# Altium PCB MARK1_EDU_PMOD.PcbDoc
Units mil, origin at the board's own origin, x right, y up, seen from the top; angles counter-clockwise.
Board outline 3593 x 2000 mil, 2 copper layers (Top Layer, Bottom Layer); 46 components, 54 nets, 285 pads, 555 vias.
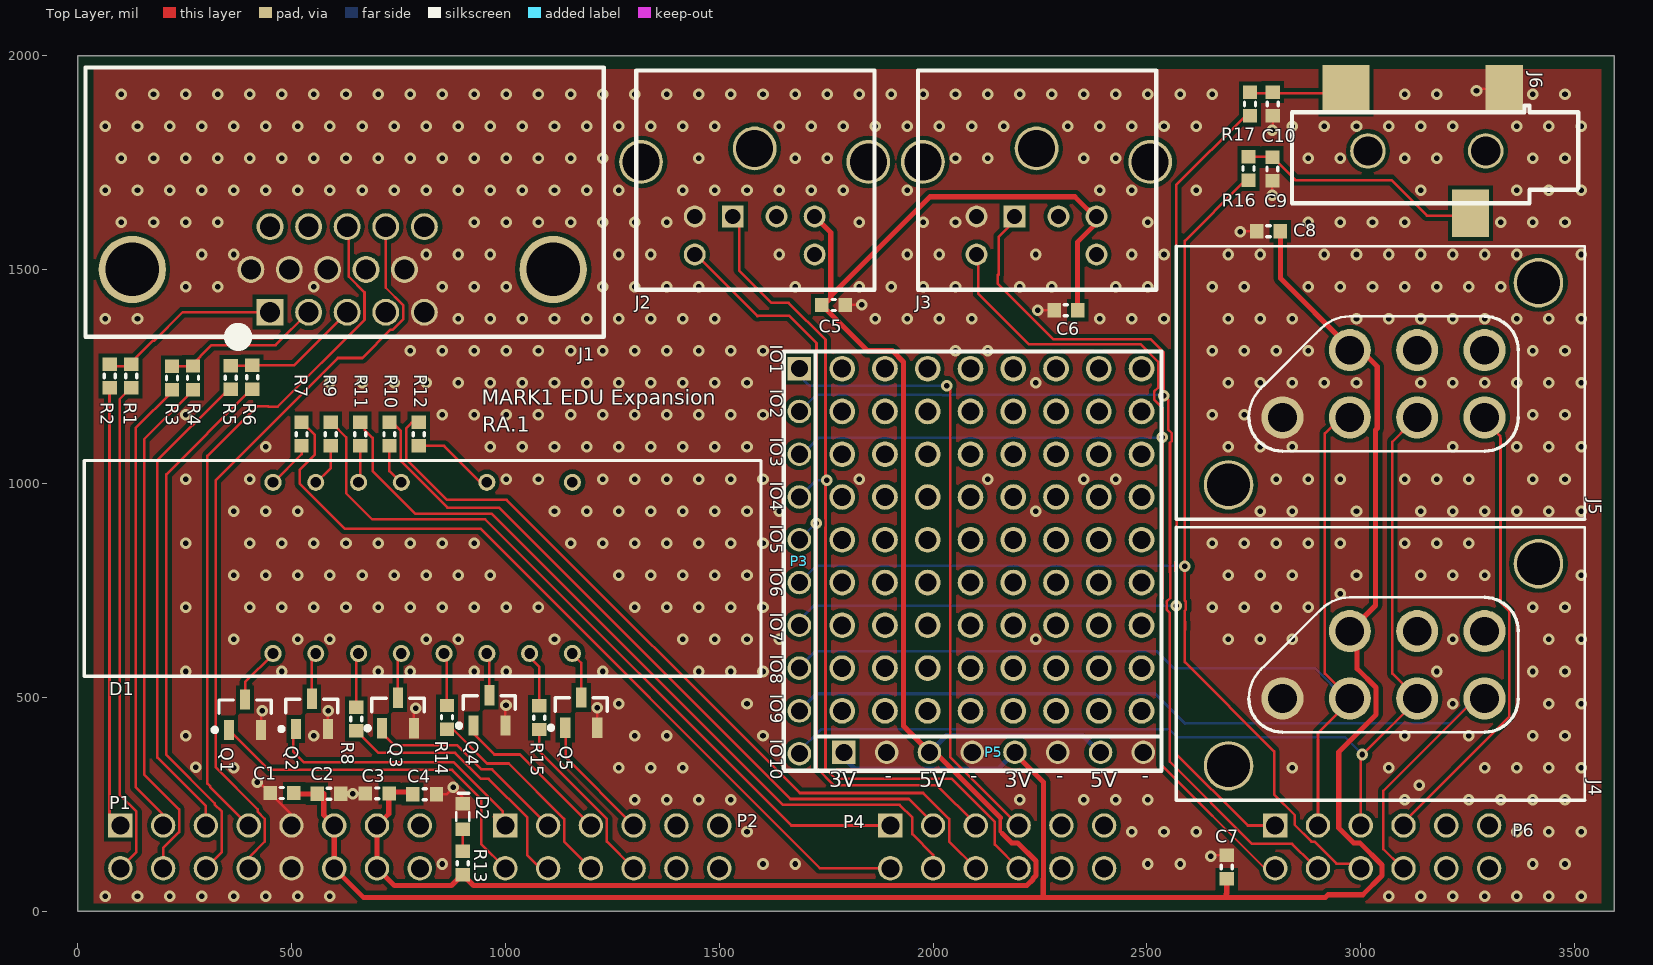
[diagram p0: Top Layer view]
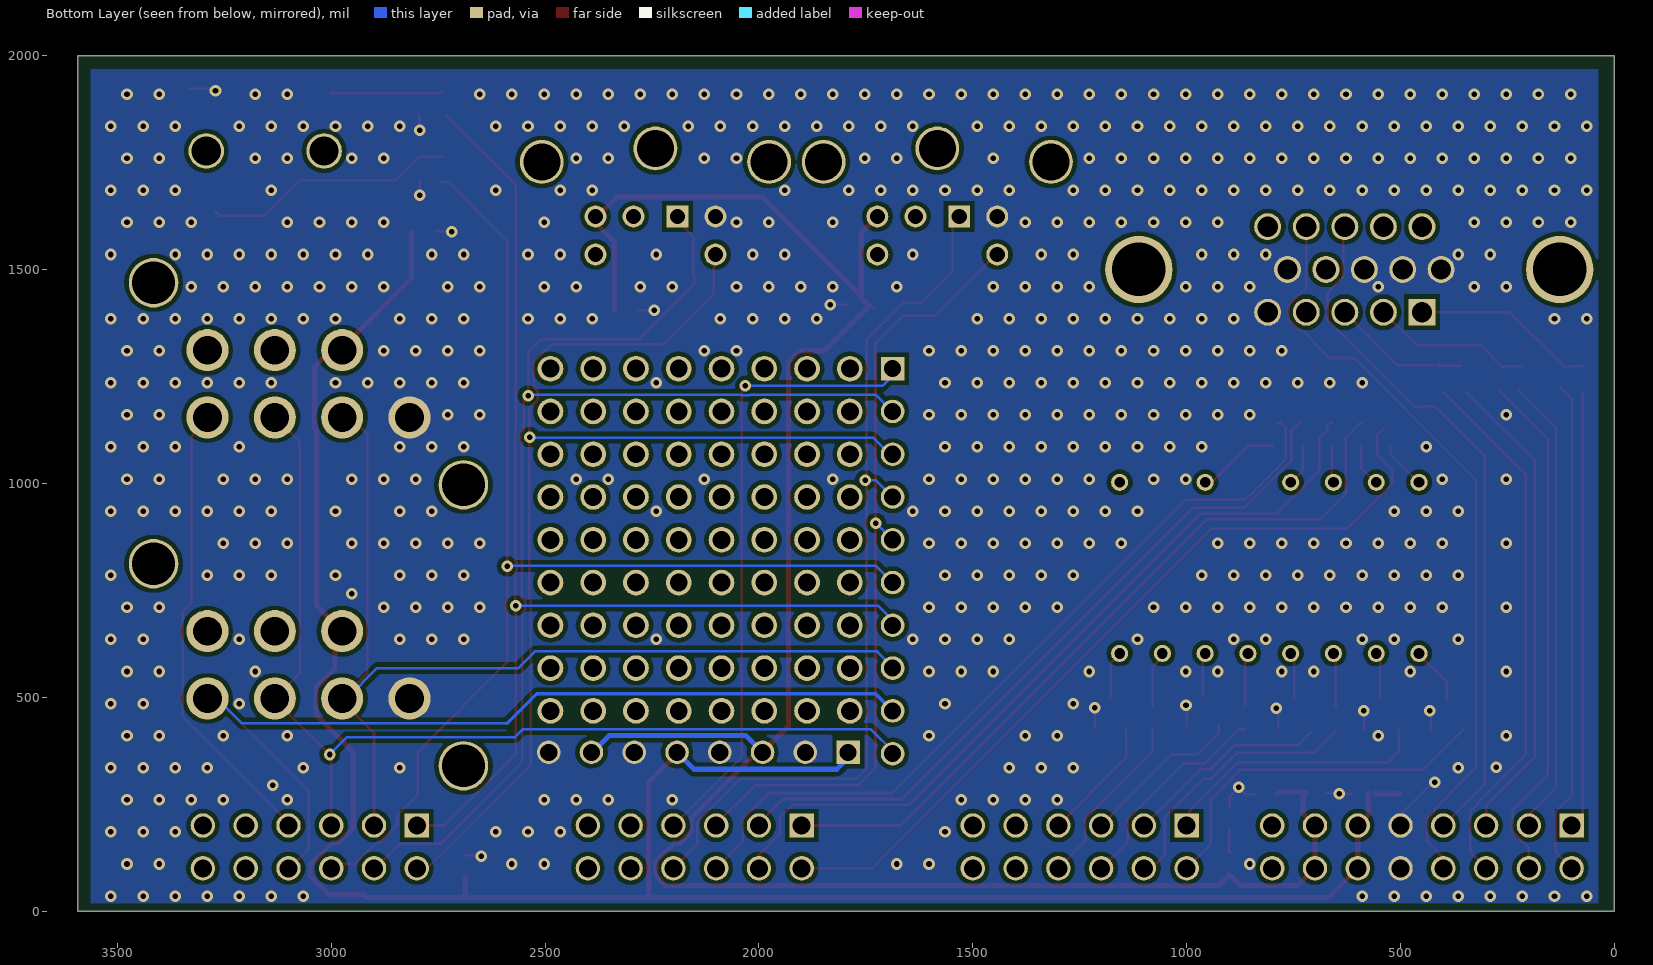
[diagram p1: Bottom Layer view, seen from below]
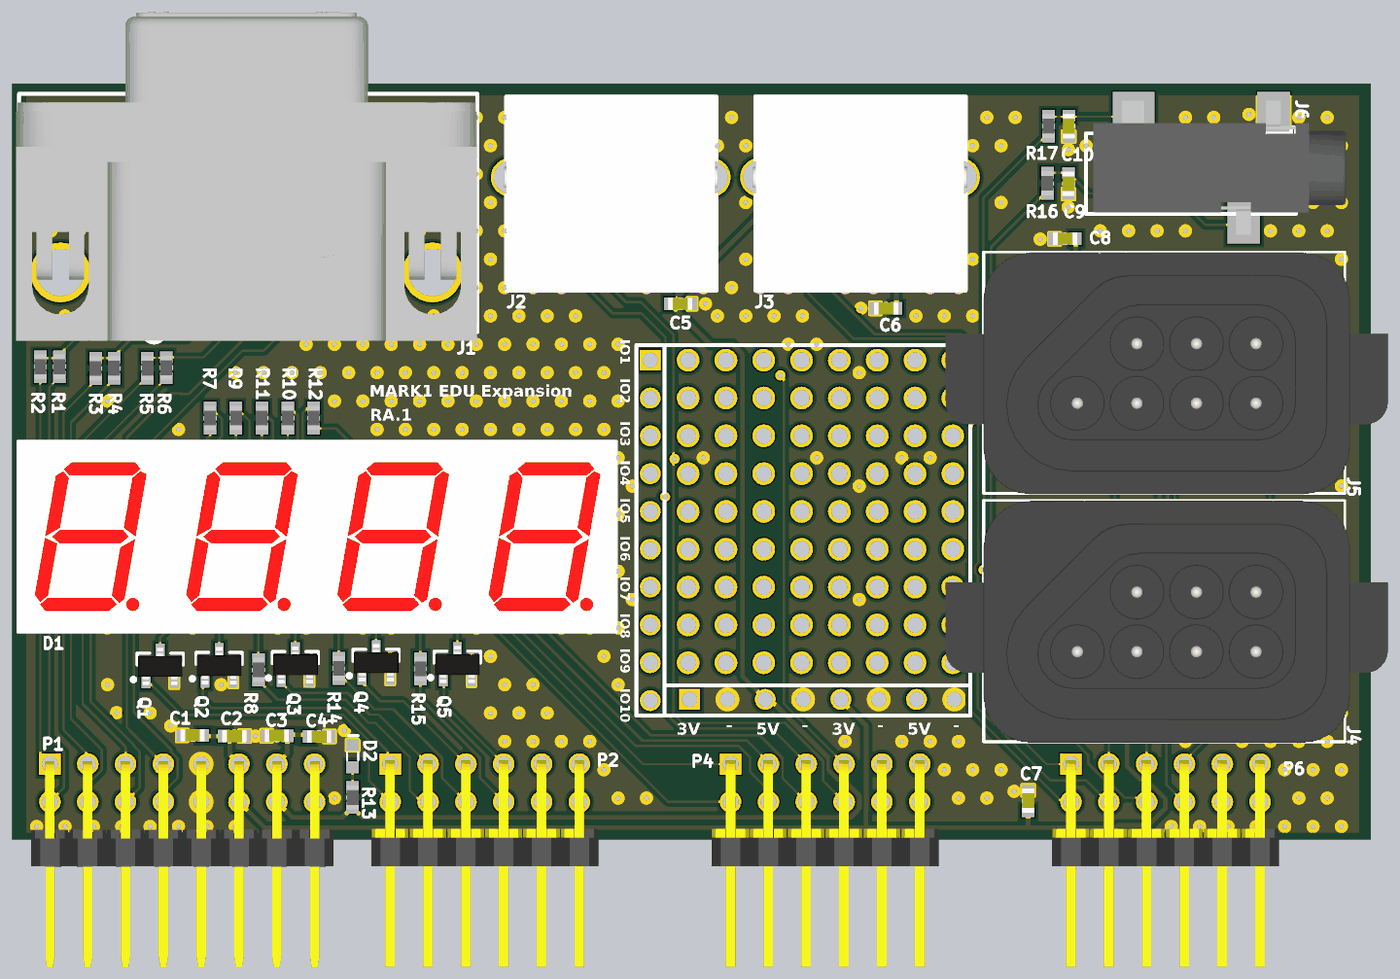
[diagram p2: 3D render of the assembled board from above, using the file's embedded part models]

## Layer stack, top to bottom
Top Layer: signal copper 1.4
Dielectric: dielectric 12.6, FR-4, Dk 4.8
Bottom Layer: signal copper 1.4

## Board outline
0,0 0,2000 3593,2000 3593,0

## Design rules (kind name [scope] priority, off if disabled: settings)
Clearance Poly [InPoly] p1: gap=10
Clearance [All] p2: gap=6
ComponentClearance LEDS+Mounts [(HasFootprint('LTM-450')) vs (HasFootprint('LED T1-3/4 GREEN - 0.45" STANDOFF') OR HasFootprint('LED T1-3/4 RED -  0.45" STANDOFF'))] p1: gap=0 collisioncheckmode=3 verticalgap=0 showdistances=FALSE
ComponentClearance ComponentClearance_1 [OnLayer('Mechanical 1')] p2: gap=0 collisioncheckmode=3 verticalgap=0 showdistances=FALSE
ComponentClearance [All] p3: gap=10 collisioncheckmode=3 verticalgap=10 showdistances=FALSE
Height [All] p1: minheight=0 maxheight=1500 prefheight=500
HoleSize [All] p1: absolutevalues=TRUE maxlimit=250 minlimit=1 maxpercent=80.000 minpercent=20.000
HoleToHoleClearance [All] p1: gap=2 allowstackedmicrovias=TRUE
MinimumSolderMaskSliver [All] p1: minsoldermaskwidth=0
PolygonConnect [All] p1: connectstyle=Direct reliefconductorwidth=10 reliefentries=4 polygonreliefangle="90 Angle" airgapwidth=10
RoutingVias [All] p1: holewidth=13 width=27 viastyle="Through Hole" minholewidth=13 minwidth=27 maxholewidth=13 maxwidth=27
SilkToSilkClearance [All] p1: silktosilkclearance=0
SilkscreenOverComponentPads [All] p1: minsilkscreentomaskgap=0
SolderMaskExpansion SolderMaskExpansion_1 [ISVIA] p1: expansion=-100
SolderMaskExpansion [All] p2: expansion=4
Width [All] p1: maxlimit=100 minlimit=6 preferedwidth=6
21 further rules are at their usual default settings.

## Classes and differential pairs
component class ANALOG_IO: C53

## Components (designator, comment, footprint, x,y, rotation, side; value= is the part's Value field where it differs from the comment)
C1 "4.7uF" C0603 477.56,276 r180 top (schematic designator C2)
C2 ".1uF" C0603 587.56,274 r0 top (schematic designator C1)
C3 ".1uF" C0603 700.56,275 r180 top (schematic designator C4)
C4 "4.7uF" C0603 811.56,273 r0 top (schematic designator C3)
C5 ".1uF" C0603 1767.56,1417 r180 top (schematic designator C10)
C6 ".1uF" C0603 2310.56,1405 r0 top (schematic designator C9)
C7 ".1uF" C0603 2686.56,103 r90 top (schematic designator C5)
C8 ".1uF" C0603 2784.56,1589 r180 top
C9 ".1uF" C0603 2793.56,1735 r270 top (schematic designator C6)
C10 ".1uF" C0603 2794,1887 r270 top (schematic designator C7)
D1 "7SEG" "LED - SSEG - LTC-4727JR" 456.8,602.33 r0 top (schematic designator D7)
D2 "LED 1.6X0.8MM 570NM GRN CLR SMD" "LED_0603 - GREEN" 900.56,221 r90 top (schematic designator D1)
J1 "VGA" 1-1734530-1 450,1400 r180 top (schematic designator J2)
J2 "PS/2" "MD-60S - PS/2" 1583,1535 r180 top (schematic designator J4)
J3 "PS/2" "MD-60S - PS/2" 2242,1535 r180 top
J4 "450-32360" "NES - 450-32360" 2817,497 r90 top (schematic designator J6)
J5 "450-32360" "NES - 450-32360" 2817,1154 r90 top (schematic designator J1)
J6 "SJ-3523-SMT" SJ-3523-SMT 3430,1777 r0 top (schematic designator J5)
P1 "MTSW-108-07-G-D-130-RA" "PMOD HEADER - MTSW-108-07-G-D-130-RA" 450,150 r180 top
P2 "MTSW-106-07-G-D-130-RA" "PMOD HEADER - Male" 1250,150 r180 top
P3 "Header10" "HEADER_10_40_100THRU SIP" 1687.56,1268 r270 top (schematic designator P5)
P4 "MTSW-106-07-G-D-130-RA" "PMOD HEADER - Male" 2150,150 r180 top (schematic designator P3)
P5 "Header8" "HEADER_8_40_100THRU SIP" 1791.56,371 r0 top (schematic designator P6)
P6 "MTSW-106-07-G-D-130-RA" "PMOD HEADER - Male" 3050,150 r180 top (schematic designator P4)
Q1 "ZXMN2F34FHTA" SOT-23 391.56,459 r90 top (schematic designator Q6)
Q2 "ZXMN2F34FHTA" SOT-23 547.56,461 r90 top (schematic designator Q5)
Q3 "ZXMN2F34FHTA" SOT-23 749,463 r90 top (schematic designator Q2)
Q4 "ZXMN2F34FHTA" SOT-23 962.56,469 r90 top
Q5 "ZXMN2F34FHTA" SOT-23 1177.56,464 r90 top (schematic designator Q3)
R1 "2k" R0603 125.14,1251 r90 top (schematic designator R2)
R2 "1k" R0603 75.14,1251 r90 top (schematic designator R3)
R3 "1k" R0603 220.71,1246 r90 top (schematic designator R8)
R4 "2k" R0603 269.75,1246.72 r90 top (schematic designator R7)
R5 "1k" R0603 358,1247 r90 top (schematic designator R10)
R6 "2k" R0603 408,1248 r90 top (schematic designator R9)
R7 "100" R0603 523.56,1115 r90 top (schematic designator R20)
R8 "100" R0603 651.56,449 r270 top (schematic designator R38)
R9 "100" R0603 592.06,1115 r90 top (schematic designator R41)
R10 "100" R0603 729.06,1115 r90 top (schematic designator R22)
R11 "100" R0603 660.56,1115 r90 top (schematic designator R19)
R12 "100" R0603 797.56,1115 r90 top (schematic designator R40)
R13 "330" R0603 900.56,112 r90 top (schematic designator R6)
R14 "100" R0603 863.56,453 r270 top (schematic designator R39)
R15 "100" R0603 1079.56,452 r270 top (schematic designator R42)
R16 "1k" R0603 2737.56,1736 r90 top (schematic designator R4)
R17 "1k" R0603 2741,1887 r90 top (schematic designator R5)

## Footprints (in the part's own frame and the unit in brackets; to place one, negate y for a bottom-side part, rotate by r counter-clockwise, add the part's x,y. Pads: shape width x height; smd on the part's side, far side on the other; paste and mask are expansions set on the pad)
1-1734530-1 [mm] "VGA DB15 HD connector female"
  rect 1.6x1.6 hole 1.2: 1(0,0)
  round 1.6 hole 1.2: 2(-2.29,0) 3(-4.58,0) 4(-6.87,0) 5(-9.16,0) 6(1.14,-2.54) 7(-1.14,-2.54) 8(-3.42,-2.54) 9(-5.7,-2.54) 10(-7.98,-2.54) 11(0,-5.08) 12(-2.29,-5.08) 13(-4.58,-5.08) 14(-6.87,-5.08) 15(-9.16,-5.08)
  round 4 hole 3.18: X(-16.81,-2.54) X(8.18,-2.54)
  silkscreen extent -19.82,-14.54 10.96,1.54, body extent -19.79,-20.01 11.16,2.04, height 12.25
C0603 [mm] "0603 Generic"
  rect 0.8x0.85 smd: 1(-0.7,0) 2(0.7,0)
  silkscreen extent -0.1,-0.33 0.1,0.33, body extent -0.8,-0.42 0.82,0.4, height 0.46
"HEADER_8_40_100THRU SIP" [mil]
  rect 55x55 hole 40: 1(0,0)
  round 55 hole 40: 2(100,0) 3(200,0) 4(300,0) 5(400,0) 6(500,0) 7(600,0) 8(700,0)
"HEADER_10_40_100THRU SIP" [mil] "HEADER 100 MIL PITCH"
  rect 55x55 hole 40: 1(0,0)
  round 55 hole 40: 2(100,0) 3(200,0) 4(300,0) 5(400,0) 6(500,0) 7(600,0) 8(700,0) 9(800,0) 10(900,0)
"LED - SSEG - LTC-4727JR" [mil] "LED - SSEG - LTC-4727JR"
  round 40 hole 25: 1(0,0) 2(100,0) 3(200,0) 4(300,0) 5(400,0) 6(500,0) 7(600,0) 8(700,0) 9(700,400) 11(500,400) 13(300,400) 14(200,400) 15(100,400) 16(0,400)
  silkscreen extent -441,-53 1141,451, body extent -441,-53 1141,451, height 276
"LED_0603 - GREEN" [mm] "LED_0603 - GREEN"
  rect 0.8x0.85 smd: A(-0.75,0) C(0.75,0)
  silkscreen extent -0.25,-0.38 1.37,0.38, body extent -0.8,-0.4 0.8,0.4, height 0.75
"MD-60S - PS/2" [mm]
  rect 1.3x1.3 hole 0.9: 1(1.3,-2.26)
  round 1.3 hole 0.9: 2(-1.3,-2.26) 3(3.56,-2.26) 4(-3.56,-2.26) 5(3.56,0) 6(-3.56,0)
  round 2.6 hole 2.2: x(-6.75,-5.5) x(0,-6.3) x(6.75,-5.5)
  silkscreen extent -7.11,-10.92 7.04,2.1, body extent -7.17,-11 7.17,2.1, height 13.3
"NES - 450-32360" [mm] "NES Controller Socket"
  round 2.5 hole 1.7: 1(0,0) 2(0,-4) 3(0,-8) 4(0,-12) 5(4,-12) 6(4,-8) 7(4,-4)
  round 2.94 hole 2.54 paste+0: 8(-4,3.2) 9(8,-15.2)
  silkscreen extent -6.04,-17.96 10.16,6.3, body extent -6.12,-20.85 10.13,8.86, height 17.61
"PMOD HEADER - Male" [mil] "68021-212HLF"
  rect 57x57 hole 42: 1(250,-50)
  round 57 hole 42: 2(150,-50) 3(50,-50) 4(-50,-50) 5(-150,-50) 6(-250,-50) 7(250,50) 8(150,50) 9(50,50) 10(-50,50) 11(-150,50) 12(-250,50)
  body extent -300,-60 300,486, height 225
"PMOD HEADER - MTSW-108-07-G-D-130-RA" [mil] "MTSW-108-07-G-D-130-RA"
  rect 57x57 hole 42: 1(350,-50)
  round 57 hole 42: 2(250,-50) 3(150,-50) 4(50,-50) 5(-50,-50) 6(-150,-50) 7(350,50) 8(250,50) 9(150,50) 10(50,50) 11(-50,50) 12(-150,50) 13(-250,-50) 14(-350,-50) 15(-250,50) 16(-350,50)
  body extent -400,-58 400,487, height 237
R0603 [mm] "0603 Generic"
  rect 0.8x0.85 smd: 1(-0.7,0) 2(0.7,0)
  silkscreen extent -0.1,-0.33 0.1,0.33, body extent -0.81,-0.41 0.81,0.41, height 0.46
SJ-3523-SMT [mm] "3.5MM Stereo Audio Jack"
  rect 2.2x2.8 smd: 1(-2.4,3.7) 3(-4.4,-3.7)
  rect 2.8x2.8 smd: 2(-11.8,3.7)
  round 2.108 hole 1.727 unplated: H1(-3.5,0) H2(-10.5,0)
  silkscreen extent -15,-3.1 2,2.7, body extent -14.52,-4.5 2.48,4.5, height 5.04
SOT-23 [mm] "SOT-23"
  rect 1.2x0.6 smd: 1(-0.9,0.95) 2(-0.9,-0.95) 3(0.9,0)
  silkscreen extent -1.02,-1.55 0.87,1.92, body extent -1.27,-1.5 1.23,1.5, height 1.07

## Part data
C1 C4: library part "C0603 - GRM188F51A475ZE20D", "4.7uF 10volts Y5V +80-20% (MLCC) - SMD/SMT 0603"
C2 C3 C5 C6 C7 C8 C9 C10: library part "C0603 - GRM188R71H104KA93D", "0.1uF 50volts X7R 10% MLCC SMD/SMT 0603"
D1: library part "LED - SSEG - LTC-4727JR", "LED Displays & Accessories 4 Digit, Red Low Current"
D2: library part APT1608CGCK
J1: library part "VGA - 1-1734530-1", "CONN HD D-SUB RCPT R/A 15POS"
J2 J3: library part "Con - D-60S", "CONN MINIDIN RECPT UNSHIELD 6POS - PS/2 mouse - keybaord"
J4 J5: "NES CONTROLLER SOCKET"
J6: "CONN AUDIO JACK 3.5MM STEREO SMD"
P1: library part "P-MOD - MTSW-108-07-G-D-130-RA", "Samtec Male Conn Unshrouded Header HDR 16 POS 2.54mm Solder RA Thru-Hole"
P2 P4 P6: library part "P-MOD - MTSW-106-07-G-D-130-RA", "Samtec Male Conn Unshrouded Header HDR 12 POS 2.54mm Solder RA Thru-Hole"
P3: "Header 10 pin"
P5: "Header 8 pin"
Q1 Q2 Q3 Q4 Q5: "MOSFET N-CHAN 20V SOT23-3"
R1 R4 R6: library part "R0603 - ERJ-3EKF2001V", "RES 2.00K OHM 1/10W 1% 0603 SMD"
R2 R3 R5: library part "R0603 - ERJ-3EKF1001V", "1Kohms 1% Thick Film Resistors - SMD 0603  Tol"
R7 R8 R9 R10 R11 R12 R14 R15: library part Res-Eli, "RES 10.0K OHM 1/10W 1% 0603 SMD"
R13: library part ERJ-3EKF3300V, "RES 330 OHM 1/10W 1% 0603 SMD"
R16 R17: library part ERJ-3EKF1001V, "RES 1.00K OHM 1/10W 1% 0603 SMD"

## Free pads (board coordinates)
  round 60 hole 42: X(1787.56,468) X(1787.56,568) X(1787.56,668) X(1787.56,768) X(1787.56,868) X(1787.56,968) X(1787.56,1068) X(1787.56,1168) X(1787.56,1268) X(1887.56,468) X(1887.56,568) X(1887.56,668) X(1887.56,768) X(1887.56,868) X(1887.56,968) X(1887.56,1068) X(1887.56,1168) X(1887.56,1268) X(1987.56,468) X(1987.56,568) X(1987.56,668) X(1987.56,768) X(1987.56,868) X(1987.56,968) X(1987.56,1068) X(1987.56,1168) X(1987.56,1268) X(2087.56,468) X(2087.56,568) X(2087.56,668) X(2087.56,768) X(2087.56,868) X(2087.56,968) X(2087.56,1068) X(2087.56,1168) X(2087.56,1268) X(2187.56,468) X(2187.56,568) X(2187.56,668) X(2187.56,768) X(2187.56,868) X(2187.56,968) X(2187.56,1068) X(2187.56,1168) X(2187.56,1268) X(2287.56,468) X(2287.56,568) X(2287.56,668) X(2287.56,768) X(2287.56,868) X(2287.56,968) X(2287.56,1068) X(2287.56,1168) X(2287.56,1268) X(2387.56,468) X(2387.56,568) X(2387.56,668) X(2387.56,768) X(2387.56,868) X(2387.56,968) X(2387.56,1068) X(2387.56,1168) X(2387.56,1268) X(2487.56,468) X(2487.56,568) X(2487.56,668) X(2487.56,768) X(2487.56,868) X(2487.56,968) X(2487.56,1068) X(2487.56,1168) X(2487.56,1268)

## Via types
v1: diameter 27, hole 13, Top Layer to Bottom Layer, 555 vias

## Nets (pads, with @x,y where several pads share a name; then routed paths per layer and width w, separated by ;. In a path a pad name is that pad's centre, name@x,y a point inside that pad or via, vN(x,y) a via of type N, cw(c..) or ccw(c..) an arc to the next point about the centre after c; other vN are vias at no path point)
3V3: C1.1 C2.1 C7.1 C8.1 J4.7 J5.7 P1.6 P1.12 P5.1 P5.5 | length 5308.1
  Top Layer w12: C1.1@501.56,275 502.56,274 C2.1@559.56,274 ; C2.1@559.56,276 C2.1@559.56,274 ; C2.1 C2.1@559.56,274 ; C2.1@575.56,275 575.56,224.44 P1.6 ; P1.6@596.56,195 600,191.56 P1.12 668,32 2917.56,32 2923.56,38 3004.56,38 3049.56,83 3049.56,107.72 2997.78,159.5 2983.22,159.5 2948.56,194.17 2948.56,372 3035.69,459.13 3035.69,522.35 2991.56,566.49 J4.7@2991.56,642 ; P5.5@2181.56,378 2258.5,301.06 2258.5,75.77 2257.56,74.83 2257.56,34 ; 2685.56,40 2686.56,41 C7.1 ; C8.1 2812.12,1479.44 J5.7@2971.56,1320 ; J4.7 3034.56,714.56 3034.56,1124.51 3038.69,1128.65 3038.69,1272.87 J5.7@2991.56,1320
  Bottom Layer w12: P5.1@1779.56,370 1818.06,331.5 2152.06,331.5 P5.5
5V: C3.1 C4.1 C5.2 C6.2 J2.4 J3.4 P1.13 P1.15 P5.3 P5.7 R13.1 | length 5046.6
  Top Layer w6: C5.2@1730.56,1412 C5.2@1732.78,1409.78
  Top Layer w8: 2157.56,218 2157.56,185.17 2162.14,180.58
  Top Layer w12: P1.13@694.78,194.78 700,189.56 P1.15 740.5,59.5 874.06,59.5 R13.1@896.56,82 ; P1.13 727.56,227.56 C3.1@727.56,273 ; C3.1@721.56,277 720.56,278 783.56,278 C4.1@788.56,273 ; R13.1 925.5,59.5 2219.06,59.5 2233.56,74 2233.56,76.28 2240.5,83.22 2240.5,116.78 2197.78,159.5 2183.22,159.5 2162.14,180.58 ; J2.4 1760.75,1586.39 1760.75,1437.75 ; C5.2 1847,1310 1904.96,1310 1931.06,1283.9 1931.06,432.5 P5.3@1990.56,373 ; C5.2@1745.56,1418 1760.75,1433.19 1760.75,1437.75 ; P5.3@1998.06,377.5 2157.56,218 ; C6.2 2338.12,1564.56 J3.4@2388.56,1615 ; J3.4@2386.56,1615 2331.56,1670 1993,1670 1760.75,1437.75
  Bottom Layer w12: P5.3 2031.06,410.5 2350.06,410.5 P5.7@2380.56,380
GND: C1.2 C2.2 C3.2 C4.2 C5.1 C6.1 C7.2 C8.2 C9.2 C10.2 D2.C J1.5 J1.6 J1.7 J1.8 J1.10 J2.3 J3.3 J4.1 J5.1 J6.1 P1.5 P1.11 P5.2 P5.4 P5.6 P5.8 Q1.2 Q2.2 Q3.2 Q4.2 Q5.2 | length 820.6
  Top Layer w6: v1(419.56,301) 425,301 C1.2 ; Q1.2 428.96,465.4 v1(431.56,468) ; C1.2@447.56,278 500,225.56 P1.5 ; Q2.2 584.96,467.4 v1(585.56,468) ; C2.2 v1(643.56,274) 646.56,277 C3.2@672.56,277 ; Q3.2 786.4,469.84 v1(790.56,474) ; C4.2 862.56,273 v1@878.06,288.5 ; D2.C@899.56,245 899.56,267 v1@878.06,288.5 ; Q4.2 999.96,479.4 v1(1001.56,481) ; v1(1214.56,475) 1214.96,474.6 Q5.2 ; C5.1 v1(1833.56,1417) ; v1(2244.56,1405) C6.1 ; v1(2649.56,128) 2652.12,130.56 C7.2 ; v1(2718.56,1588) 2719.56,1589 C8.2 ; v1(2792.56,1673) 2793.56,1674 C9.2 ; v1(2793.56,1825) 2794,1825.44 C10.2 ; v1(3270.56,1918) 3275.23,1922.67 J6.1 ; v1@878.06,288.5 v1(878.56,289) 877.56,289 v1@878.06,288.5
  other v1: 65,35 140,35 215,35 290,35 365,35 440,35 515,35 590,35 3065,35 3140,35 3215,35 3290,35 3365,35 3440,35 3515,35 852.5,110 1602.5,110 1677.5,110 2502.5,110 2577.5,110 3402.5,110 3477.5,110 1565,185 2465,185 2540,185 2615,185 3365,185 3440,185 3515,185 1302.5,260 1377.5,260 1452.5,260 1527.5,260 2202.5,260 2352.5,260 2427.5,260 2502.5,260 3102.5,260 3252.5,260 3327.5,260 3402.5,260 3477.5,260 3136.56,294 365,335 1265,335 1340,335 1415,335 2840,335 3065,335 3290,335 3365,335 3440,335 3515,335 276.56,336 252.5,410 552.5,410 1302.5,410 1377.5,410 1602.5,410 3102.5,410 3252.5,410 3402.5,410 3477.5,410 1265,485 1565,485 3215,485 3440,485 3515,485 252.5,560 477.5,560 702.5,560 777.5,560 927.5,560 1002.5,560 1227.5,560 1452.5,560 1527.5,560 1602.5,560 3177.5,560 3402.5,560 3477.5,560 365,635 515,635 590,635 815,635 890,635 1115,635 1415,635 1490,635 1565,635 1640,635 2240,635 2690,635 2765,635 2840,635 3215,635 3440,635 3515,635 252.5,710 402.5,710 477.5,710 552.5,710 627.5,710 702.5,710 777.5,710 852.5,710 927.5,710 1002.5,710 1077.5,710 1302.5,710 1377.5,710 1452.5,710 1527.5,710 1602.5,710 2652.5,710 2727.5,710 2802.5,710 2877.5,710 3402.5,710 3477.5,710 2952.56,742 365,785 440,785 515,785 590,785 665,785 740,785 815,785 890,785 965,785 1265,785 1340,785 1415,785 1490,785 1565,785 2690,785 2765,785 2840,785 2990,785 3140,785 3215,785 3290,785 3515,785 252.5,860 402.5,860 477.5,860 552.5,860 627.5,860 702.5,860 777.5,860 852.5,860 927.5,860 1152.5,860 1227.5,860 1302.5,860 1377.5,860 1452.5,860 1527.5,860 1602.5,860 2652.5,860 2727.5,860 2802.5,860 2877.5,860 2952.5,860 3102.5,860 3177.5,860 3252.5,860 365,935 440,935 515,935 1115,935 1190,935 1265,935 1340,935 1415,935 1490,935 1565,935 1640,935 2240,935 2765,935 2840,935 2990,935 3140,935 3215,935 3290,935 3365,935 3440,935 3515,935 252.5,1010 402.5,1010 1002.5,1010 1077.5,1010 1227.5,1010 1302.5,1010 1377.5,1010 1452.5,1010 1527.5,1010 1602.5,1010 1827.5,1010 2127.5,1010 2352.5,1010 2427.5,1010 2802.5,1010 2877.5,1010 2952.5,1010 3102.5,1010 3177.5,1010 3252.5,1010 3402.5,1010 3477.5,1010 440,1085 965,1085 1040,1085 1115,1085 1190,1085 1265,1085 1340,1085 1415,1085 1490,1085 1565,1085 2690,1085 2765,1085 2840,1085 3215,1085 3365,1085 3440,1085 3515,1085 252.5,1160 852.5,1160 927.5,1160 1002.5,1160 1077.5,1160 1152.5,1160 1227.5,1160 1302.5,1160 1377.5,1160 1452.5,1160 1527.5,1160 1602.5,1160 2652.5,1160 2727.5,1160 3402.5,1160 3477.5,1160 590,1235 665,1235 740,1235 815,1235 890,1235 965,1235 1040,1235 1115,1235 1190,1235 1265,1235 1340,1235 1415,1235 1490,1235 1565,1235 2240,1235 2690,1235 2765,1235 2840,1235 2915,1235 2990,1235 3140,1235 3215,1235 3290,1235 3365,1235 3440,1235 3515,1235 777.5,1310 852.5,1310 927.5,1310 1002.5,1310 1077.5,1310 1152.5,1310 1227.5,1310 1302.5,1310 1377.5,1310 1452.5,1310 1527.5,1310 1602.5,1310 2052.5,1310 2127.5,1310 2652.5,1310 2727.5,1310 2802.5,1310 2877.5,1310 3402.5,1310 3477.5,1310 65,1385 140,1385 890,1385 965,1385 1040,1385 1115,1385 1190,1385 1265,1385 1340,1385 1415,1385 1490,1385 1865,1385 1940,1385 2015,1385 2090,1385 2390,1385 2465,1385 2540,1385 2690,1385 2765,1385 2840,1385 2990,1385 3065,1385 3140,1385 3215,1385 3290,1385 3365,1385 3440,1385 3515,1385 252.5,1460 327.5,1460 552.5,1460 852.5,1460 927.5,1460 1002.5,1460 1227.5,1460 1302.5,1460 1377.5,1460 1452.5,1460 1677.5,1460 1827.5,1460 1902.5,1460 1977.5,1460 2052.5,1460 2202.5,1460 2277.5,1460 2427.5,1460 2502.5,1460 2652.5,1460 2727.5,1460 2877.5,1460 2952.5,1460 3027.5,1460 3102.5,1460 3177.5,1460 3252.5,1460 3327.5,1460 290,1535 365,1535 815,1535 890,1535 965,1535 1265,1535 1340,1535 1640,1535 1940,1535 2015,1535 2240,1535 2465,1535 2540,1535 2690,1535 2765,1535 2915,1535 2990,1535 3065,1535 3140,1535 3215,1535 3290,1535 3365,1535 3515,1535 102.5,1610 177.5,1610 252.5,1610 327.5,1610 927.5,1610 1002.5,1610 1077.5,1610 1152.5,1610 1227.5,1610 1302.5,1610 1377.5,1610 1827.5,1610 1977.5,1610 2052.5,1610 2502.5,1610 2877.5,1610 2952.5,1610 3027.5,1610 3102.5,1610 3327.5,1610 3402.5,1610 3477.5,1610 65,1685 140,1685 215,1685 290,1685 365,1685 440,1685 515,1685 590,1685 665,1685 740,1685 815,1685 890,1685 965,1685 1040,1685 1115,1685 1190,1685 1265,1685 1415,1685 1490,1685 1565,1685 1640,1685 1715,1685 1790,1685 1940,1685 2390,1685 2465,1685 2615,1685 3140,1685 3365,1685 3440,1685 3515,1685 102.5,1760 177.5,1760 252.5,1760 327.5,1760 402.5,1760 477.5,1760 552.5,1760 627.5,1760 702.5,1760 777.5,1760 852.5,1760 927.5,1760 1002.5,1760 1077.5,1760 1152.5,1760 1227.5,1760 1452.5,1760 1677.5,1760 1752.5,1760 2052.5,1760 2127.5,1760 2352.5,1760 2427.5,1760 2877.5,1760 2952.5,1760 3102.5,1760 3177.5,1760 3402.5,1760 3477.5,1760 65,1835 140,1835 215,1835 290,1835 365,1835 440,1835 515,1835 590,1835 665,1835 740,1835 815,1835 890,1835 965,1835 1040,1835 1115,1835 1190,1835 1265,1835 1340,1835 1415,1835 1490,1835 1640,1835 1715,1835 1790,1835 1865,1835 1940,1835 2015,1835 2090,1835 2165,1835 2315,1835 2390,1835 2465,1835 2540,1835 2615,1835 2840,1835 2915,1835 2990,1835 3065,1835 3140,1835 3215,1835 3365,1835 3440,1835 3515,1835 102.5,1910 177.5,1910 252.5,1910 327.5,1910 402.5,1910 477.5,1910 552.5,1910 627.5,1910 702.5,1910 777.5,1910 852.5,1910 927.5,1910 1002.5,1910 1077.5,1910 1152.5,1910 1227.5,1910 1302.5,1910 1377.5,1910 1452.5,1910 1527.5,1910 1602.5,1910 1677.5,1910 1752.5,1910 1827.5,1910 1902.5,1910 1977.5,1910 2052.5,1910 2127.5,1910 2202.5,1910 2277.5,1910 2352.5,1910 2427.5,1910 2502.5,1910 2577.5,1910 2652.5,1910 3102.5,1910 3177.5,1910 3402.5,1910 3477.5,1910
IO1: P3.1 P4.4 | length 1475.8
  Top Layer w6: v1(2031.56,1228) 2040.56,1219 2040.56,359.44 P4.4
  Bottom Layer w6: P3.1@1670.56,1269 1711.56,1228 v1(2031.56,1228)
NES1_DAT: J5.4 P6.4 | length 1062.9
  Top Layer w6: P6.4 3100,207.44 3347.65,455.09 3347.65,700.69 3326.66,721.68 3326.66,1105.9 3325.66,1104.9 3325.66,1110.9 J5.4@3298.56,1138
NES2_DAT/IO9: J4.4 P3.9 P6.10 | length 2147.8
  Top Layer w6: P6.10@3093.56,104 3052.56,145 3052.56,281 3258.56,487 J4.4@3275.56,487
  Bottom Layer w6: 2588.56,438.79 3208.35,438.79 J4.4@3264.56,495
  Bottom Layer w8: P3.9 1727.56,508 2519.35,508 2588.56,438.79
NES_CLK/IO8: J4.2 J5.2 P3.8 P6.2 | length 2360.7
  Top Layer w6: P6.2 2900,416.44 J4.2@2975.56,492 ; J5.2@2950.56,1148 2947.56,1148 2916.27,1116.71 2916.27,555.21 J4.2
  Bottom Layer w6: P3.8@1681.56,565 1723.56,607 2523.56,607 2562.56,568 2892.56,568 J4.2@2964.56,496
NES_LAT/IO10: J4.3 J5.3 P3.10 P6.3 | length 2390.3
  Top Layer w6: P6.3 v1@3000,361.44 ; v1@3004.06,365.5 J4.3@3114.56,476 ; J5.3@3110.56,1134 3073.75,1097.19 3073.75,555.21 J4.3 ; J4.3@3115.56,475 J4.3@3134.76,494.2
  Bottom Layer w6: P3.10@1682.56,369 1739.06,425.5 2551.45,425.5 2570.56,406.39 2963.17,406.39 v1(3003.56,366)
NetC9_1: C9.1 J6.3 R16.2 | length 591.9
  Top Layer w6: R16.2 2791,1763.56 C9.1@2791.56,1763 ; C9.1 2847.12,1709 3071.56,1709 3154.56,1626 3260.56,1626 J6.3@3270.56,1636
NetC10_1: C10.1 J6.2 R17.2 | length 261.6
  Top Layer w6: R17.2 2743.56,1912 J6.2@3001.56,1912
NetD1_1: D1.1 Q1.3 | length 133.9
  Top Layer w6: Q1.3 391.56,535 D1.1@457.56,601
NetD1_2: D1.2 Q2.3 | length 107.5
  Top Layer w6: Q2.3 547.56,593 554.56,600 D1.2@554.56,601
NetD1_3: D1.3 R8.1 | length 130.3
  Top Layer w6: R8.1 651.56,604 D1.3@653.56,606
NetD1_4: D1.4 Q3.3 | length 104.7
  Top Layer w6: Q3.3 749,592.44 D1.4@756.56,600
NetD1_5: D1.5 R14.1 | length 127.8
  Top Layer w6: D1.5@855.56,605 863.56,597 R14.1
NetD1_6: D1.6 Q4.3 | length 92.1
  Top Layer w6: D1.6@956.56,594 962.56,588 Q4.3
NetD1_7: D1.7 R15.1 | length 124
  Top Layer w6: D1.7@1056.56,594 1079.56,571 R15.1
NetD1_8: D1.8 Q5.3 | length 106
  Top Layer w6: D1.8@1159.56,598 1177.56,580 Q5.3
NetD1_11: D1.11 R12.1 | length 199.3
  Top Layer w6: R12.1 857.12,1087.44 942.23,1002.33 D1.11 ; D1.11@956.8,1005 D1.11@961.56,1005
NetD1_13: D1.13 R10.1 | length 106.3
  Top Layer w6: R10.1 729.06,1028.5 D1.13@762.56,995
NetD1_14: D1.14 R11.1 | length 85.1
  Top Layer w6: D1.14@656.56,1004 660.56,1008 R11.1
NetD1_15: D1.15 R9.1 | length 103.6
  Top Layer w6: D1.15@555.56,999 592.06,1035.5 R9.1
NetD1_16: D1.16 R7.1 | length 112.8
  Top Layer w6: D1.16@457.56,1002 523.56,1068 R7.1
NetD2_A: D2.A R13.2 | length 56.7
  Top Layer w6: R13.2@897.56,136 900.56,139 R13.2 D2.A
NetJ1_1: J1.1 R1.2 R2.2 | length 429.8
  Top Layer w6: R2.2@73.56,1274 118.56,1274 122.56,1278 122.56,1280 175.56,1333 178.56,1333 245.56,1400 J1.1
NetJ1_2: J1.2 R3.2 R4.2 | length 379.3
  Top Layer w6: R3.2@215.56,1274 258.56,1274 261.56,1271 313.56,1323 463.16,1323 J1.2
NetJ1_3: J1.3 R5.2 R6.2 | length 326.9
  Top Layer w6: R5.2 403.12,1274.56 R6.2@410.56,1282 ; R6.2 506.12,1275.56 J1.3@628.56,1398
PS2_1_CLK/IO3: J3.5 P3.3 P6.7 | length 2767.2
  Top Layer w6: J3.5@2105.56,1534 2105.56,1444 2224.56,1325 2485.71,1325 2526.56,1284.15 2526.56,1223.82 2517.06,1214.32 2517.06,1195.68 2537.56,1175.18 2537.56,731.79 2534.06,728.29 2534.06,341.5 2775.56,100 P6.7
  Bottom Layer w6: P3.3@1687.56,1061 1733.56,1107 2534.56,1107 v1(2535.56,1108)
PS2_1_DAT/IO2: J3.1 P3.2 P6.8 | length 2907.1
  Top Layer w6: 2151.56,1488 2151.56,1466.18 2280.74,1337 2508.56,1337 2539.56,1306 v1(2539.56,1205) 2549.56,1195 2549.56,1125.82 2558.06,1117.32 2558.06,1098.68 2554.06,1094.68 2554.06,791.71 2554.56,791.21 2554.56,731.82 2546.06,723.32 2546.06,704.68 2553.56,697.18 2553.56,349 2745.56,157 2839.56,157 2884.56,112 P6.8@2895.56,112 ; 2153.56,1488 2153.56,1576 J3.1@2195.56,1618
  Bottom Layer w6: P3.2 1726.56,1207 2020.74,1207 2022.24,1205.5 2040.88,1205.5 2042.38,1207 2537.56,1207 v1(2539.56,1205)
PS2_2_CLK/IO5: J2.5 P3.5 P4.3 | length 1856
  Top Layer w6: J2.5@1446.56,1534 1589.56,1391 ; 1590.56,1392 1663.56,1392 1727.56,1328 1727.56,335.03 1768.59,294 2009.56,294 2100,203.56 P4.3 ; P4.3@2099.28,199.28 P4.3@2107.56,191
  Bottom Layer w6: P3.5 v1(1726.56,907)
PS2_2_DAT/IO4: J2.1 P3.4 P4.10 | length 2072.7
  Top Layer w6: J2.1@1529.56,1632 1546.56,1615 1546.56,1498 1622.57,1421.99 1662.57,1421.99 1748.56,1336 1748.56,916.82 1749.06,916.32 1749.06,897.68 1748.56,897.18 1748.56,333 1772.56,309 2044.03,309 2144.56,208.47 2144.56,155.44 P4.10
  Bottom Layer w6: P3.4 1726.56,1007 v1(1751.56,1007)
PWM1/IO6: P3.6 P6.9 R16.1 | length 2793.3
  Top Layer w6: R16.1@2742.56,1704 2725.56,1704 2588.56,1567 v1(2588.56,806) 2588.56,725.82 2591.06,723.32 2591.06,704.68 2588.56,702.18 2588.56,676.82 2589.06,676.32 2589.06,657.68 2588.56,657.18 2588.56,582 2797.56,373 2797.56,272.17 2845.64,224.08 2845.64,201.32 2884.47,162.5 2891.56,162.5 2943.06,111 P6.9@2998.56,111
  Bottom Layer w6: P3.6 1726.56,807 2587.56,807 v1(2588.56,806)
PWM2/IO7: P3.7 P6.1 R17.1 | length 2770.4
  Top Layer w6: R17.1@2731.56,1860 2568.56,1697 2568.56,1123.79 2570.06,1122.29 2570.06,819.32 2566.06,815.32 2566.06,796.68 2570.06,792.68 2570.06,715.5 v1(2568.56,714) 2568.56,367.4 2735.96,200 P6.1
  Bottom Layer w6: P3.7@1680.56,673 1721.56,714 v1(2568.56,714)
SEG_A: P4.8 R11.2 | length 1864.5
  Top Layer w6: R11.2@659.56,1143 662.56,1143 671.56,1134 671.56,1124 689.56,1106 689.56,1028.56 789.12,929 967.89,929 1648.89,248 1921.73,248 1951.56,218.17 1951.56,180 2000,131.56 P4.8
SEG_B: P4.7 R7.2 | length 1902.8
  Top Layer w6: R7.2@539.56,1128 554.56,1113 554.56,1067 519.56,1032 519.56,998.56 624.12,894 941.56,894 1735.56,100 P4.7
SEG_C: P4.2 R10.2 | length 1700.3
  Top Layer w6: R10.2@734.56,1143 755.56,1122 755.56,1052.03 864.59,943 985.56,943 1666.56,262 1943.56,262 2000,205.56 P4.2
SEG_CTRL_A1: P2.7 Q1.1 | length 841.7
  Top Layer w6: Q1.1 447.72,330 875.56,330 943.56,262 943.56,156.44 P2.7
SEG_CTRL_A2: P2.1 Q2.1 | length 668.4
  Top Layer w6: Q2.1@504.56,424 504.56,372 528.56,348 879,348 993.56,233.44 993.56,206.44 P2.1 ; P2.1@973.56,220 P2.1@997.56,196
SEG_CTRL_A3: P2.3 Q4.1 | length 385.1
  Top Layer w6: Q4.1 925.16,415.4 974.56,366 1034,366 P2.3 ; P2.3@1200.56,207 P2.3@1202.56,205
SEG_CTRL_A4: P2.4 Q5.1 | length 292.5
  Top Layer w6: Q5.1@1143.56,426 1141.56,424 1141.56,358.44 P2.4
SEG_CTRL_L: P2.2 Q3.1 | length 479.3
  Top Layer w6: Q3.1@710.56,417 739.56,388 887.56,388 944.56,331 969,331 P2.2
SEG_D: P2.8 R8.2 | length 644.6
  Top Layer w6: R8.2 703,370 882.31,370 943.31,309 960.73,309 1051.56,218.17 1051.56,130 1095.56,86 P2.8@1095.56,93 ; P2.8@1097.56,93 P2.8@1097.56,96
SEG_DP: P2.10 R15.2 | length 415.8
  Top Layer w6: R15.2 1079.56,373.47 1237.5,215.53 1237.5,162.5 P2.10
SEG_E: P2.9 R14.2 | length 505.9
  Top Layer w6: R14.2 877.12,425.44 957.56,345 1008.03,345 1137.5,215.53 1137.5,162.5 P2.9@1199,101 ; P2.9 P2.9@1199,101 ; P2.9@1202.56,101 P2.9@1199,101
SEG_F: P4.9 R12.2 | length 1857
  Top Layer w6: R12.2@788.56,1141 780.56,1141 768.56,1129 768.56,1056 863.23,961.33 1003.23,961.33 1688.56,276 1977.03,276 2037.5,215.53 2037.5,162.5 P4.9 P4.9@2100.56,100
SEG_G: P4.1 R9.2 | length 1775.5
  Top Layer w6: R9.2@590.56,1140 595.56,1140 627.8,1107.75 627.8,976.75 688.56,916 952.56,916 1668.56,200 P4.1
VGA_B0: P1.9 R6.1 | length 1261.9
  Top Layer w6: P1.9 337.5,137.5 337.5,232.47 320.56,249.42 320.56,252 207.56,365 207.56,1021 R6.1@399.56,1213
VGA_B1: P1.3 R5.1 | length 1127.3
  Top Layer w6: P1.3 300,245.56 186.56,359 186.56,1054 R5.1@346.56,1214
VGA_G0: P1.8 R4.1 | length 1212.3
  Top Layer w6: P1.8 200,146.97 237.5,184.47 237.5,237.5 155.56,319.44 155.56,1103 R4.1@268.56,1216
VGA_G1: P1.2 R3.1 | length 1078.7
  Top Layer w6: P1.2 200,225.5 135.56,289.94 135.56,1129 R3.1@222.56,1216
VGA_HS: J1.13 P1.4 | length 1644.9
  Top Layer w6: 309.78,290.22 P1.4 ; 310.56,291 303.56,298 303.56,1064 419.56,1180 445.56,1180 ; 445.56,1179 467.56,1179 670.81,1382.25 670.81,1446.33 633.91,1483.23 633.91,1595.65 J1.13@624.56,1605
VGA_R0: P1.7 R1.1 | length 1179
  Top Layer w6: P1.7@90.56,91 137.5,137.94 137.5,232.23 98.56,271.17 98.56,1196.86 R1.1
VGA_R1: P1.1 R2.1 | length 1021.5
  Top Layer w6: R2.1@74.56,1211 74.56,225.44 P1.1
VGA_VS: J1.14 P1.10 | length 1806.7
  Top Layer w6: P1.10@400.56,91 400.56,125.56 437.5,162.5 437.5,215.53 420.79,232.25 420.79,238 322.56,336.23 322.56,1007 608.56,1293 665.56,1293 732.06,1359.5 737.25,1359.5 760.97,1383.23 760.97,1416.77 720.47,1457.27 J1.14
pads on no net: D1.9 J1.4 J1.9 J1.11 J1.12 J1.15 J1.X J2.2 J2.6 J2.x J3.2 J3.6 J3.x J4.5 J4.6 J4.8 J4.9 J5.5 J5.6 J5.8 J5.9 J6.H1 J6.H2 P1.14 P1.16 P2.5 P2.6 P2.11 P2.12 P4.5 P4.6 P4.11 P4.12 P6.5 P6.6 P6.11 P6.12

## Polygon pours and split planes (outlines as drawn)
GND on Top Layer "GND_TOP" (solid, remove dead copper, pour order 3): 37.56,1968 37.56,18 3562.56,18 3562.56,1943 3562.56,1968 37.56,1968
GND on Bottom Layer "GND_BOT" (solid, remove dead copper, pour order 4): 37.56,1968 37.56,18 3562.56,18 3562.56,1943 3562.56,1968 37.56,1968

## Silkscreen, mask and mechanical layers (free items; w line width, h text height)
Top Overlay:
  lines w10: 1725.06,408 2534.06,408 2534.06,328 ; 1727.37,1308 1725.06,1305.69 1725.06,328 ; 1725.06,328 2534.06,328 ; 1725.06,328 1650.81,328 1650.81,1308 2534.06,1308 2534.06,328
  text "IO1" at 1608.39,1323.51 h50 r270
  text "IO2" at 1608.39,1220.39 h50 r270
  text "MARK1 EDU Expansion" at 944.56,1171.96 h60
  text "RA.1" at 946.56,1108.35 h60
  text "IO3" at 1608.39,1106.82 h50 r270
  text "IO4" at 1608.39,1003.33 h50 r270
  text "IO5" at 1608.39,903.49 h50 r270
  text "IO6" at 1608.39,803.19 h50 r270
  text "IO7" at 1608.39,696.9 h50 r270
  text "IO8" at 1608.49,599.19 h50 r270
  text "IO9" at 1608.39,506.82 h50 r270
  text "IO10" at 1608.39,401.4 h50 r270
  text "-" at 1887.56,288 h60
  text "-" at 2087.56,288 h60
  text "-" at 2287.56,288 h60
  text "-" at 2487.56,288 h60
  text "3V" at 1757.56,278 h60
  text "5V" at 1967.56,278 h60
  text "3V" at 2167.56,278 h60
  text "5V" at 2367.56,278 h60
Generic Top Title Block:
  lines w0: 7414.83,-2289.5 5021.83,-2289.5 5021.83,-1699.69 7414.83,-1699.69
  lines w8: 5719.78,-2289.5 5719.78,-1699.69 ; 5719.78,-2092.9 7414.83,-2092.9 ; 5719.78,-1896.29 7414.83,-1896.29 ; 6268.18,-2092.9 6268.18,-1896.29 ; 7414.83,-2289.5 5021.83,-2289.5 5021.83,-1699.69 7414.83,-1699.69
  lines w10: -2485,-1390 -2385,-1390 ; -2485,-390 -2385,-390 -2385,610 -2485,610 ; -2485,1610 -2385,1610 ; -2485,2610 -2385,2610 ; -2485,3610 -2385,3610 ; -2485,4610 -2385,4610 ; -1485,-2390 -1485,-2290 ; -1485,5010 -1485,5110 ; -485,-2390 -485,-2290 ; -485,5010 -485,5110 ; 515,-2390 515,-2290 ; 515,5010 515,5110 ; 1515,-2390 1515,-2290 ; 1515,5010 1515,5110 ; 2515,-2390 2515,-2290 ; 2515,5010 2515,5110 ; 3515,-2390 3515,-2290 ; 3515,5010 3515,5110 ; 4515,-2390 4515,-2290 ; 4515,5010 4515,5110 ; 5515,-2390 5515,-2290 ; 5515,5010 5515,5110 ; 6515,-2390 6515,-2290 ; 6515,5010 6515,5110 ; 7414.83,-2289.5 7414.83,-1699.69 ; 7415,-1390 7515,-1390 ; 7415,-390 7515,-390 7515,610 7415,610 ; 7415,1610 7515,1610 ; 7415,2610 7515,2610 ; 7415,3610 7515,3610 ; 7415,4610 7515,4610 ; 7515,-2290 7515,-2390 ; 7515,-2390 -2485,-2390 -2485,5110 7515,5110 7515,-2390 ; -2385,-2290 7415,-2290 7415,5010 -2385,5010 -2385,-2290
  text "1" at -2020,5030 h100
  text "2" at -945,5030 h100
  text "3" at 5,5030 h100
  text "4" at 1055,5030 h100
  text "5" at 2005,5030 h100
  text "6" at 3030,5030 h100
  text "7" at 3980,5030 h100
  text "8" at 4955,5030 h100
  text "9" at 6055,5030 h100
  text "10" at 7005,5030 h100
  text "H" at -2470,4775 h100
  text "H" at 7435,4770 h100
  text "G" at -2470,4050 h100
  text "G" at 7435,4045 h100
  text "F" at -2460,3065 h100
  text "F" at 7445,3060 h100
  text "E" at -2470,2100 h100
  text "E" at 7435,2095 h100
  text "D" at -2470,1100 h100
  text "D" at 7435,1095 h100
  text "C" at -2460,130 h100
  text "C" at 7445,125 h100
  text "B" at -2465,-915 h100
  text "B" at 7440,-920 h100
  text ".PCB_TITLE" at 5769,-1837 h175
  text "" at 5520.37,-1851.77 h152.56
  text "" at 5602.48,-1851.77 h152.56
  text "A" at -2460,-1915 h100
  text "A" at 7445,-1920 h100
  text "R" at 5769.64,-2045.4 h95.35
  text "e" at 5824.38,-2045.4 h95.35
  text "v" at 5879.13,-2045.4 h95.35
  text ":" at 5933.87,-2045.4 h95.35
  text "2" at 5071.68,-2052.46 h343.27
  text ".PCB_VERSION" at 5997,-2053 h175
  text ".ENGINEER" at 6325,-2054 h175
  text "" at 5271.1,-2064.56 h343.27
  text "" at 5421.65,-2064.56 h343.27
  text "W" at 5071.68,-2143.7 h95.35
  text "a" at 5153.8,-2143.7 h95.35
  text "v" at 5208.54,-2143.7 h95.35
  text "e" at 5263.29,-2143.7 h95.35
  text "n" at 5318.03,-2143.7 h95.35
  text "u" at 5372.78,-2143.7 h95.35
  text "m" at 5427.52,-2143.7 h95.35
  text "b" at 5509.64,-2143.7 h95.35
  text "e" at 5564.38,-2143.7 h95.35
  text "r" at 5619.13,-2143.7 h95.35
  text ".GERBER_GEN_DATE" at 5754,-2238 h175
  text "T" at 5071.68,-2242 h95.35
  text "e" at 5126.42,-2242 h95.35
  text "c" at 5181.17,-2242 h95.35
  text "h" at 5222.23,-2242 h95.35
  text "n" at 5276.97,-2242 h95.35
  text "o" at 5331.72,-2242 h95.35
  text "l" at 5386.46,-2242 h95.35
  text "o" at 5413.84,-2242 h95.35
  text "g" at 5468.58,-2242 h95.35
  text "i" at 5523.33,-2242 h95.35
  text "e" at 5550.7,-2242 h95.35
  text "s" at 5605.44,-2242 h95.35
  text "1" at -2010,-2365 h100
  text "2" at -935,-2365 h100
  text "3" at 15,-2365 h100
  text "4" at 1065,-2365 h100
  text "5" at 2015,-2365 h100
  text "6" at 3040,-2365 h100
  text "7" at 3990,-2365 h100
  text "8" at 4965,-2365 h100
  text "9" at 6065,-2365 h100
  text "10" at 7015,-2365 h100
PCB Notes Title Block:
  lines w0: 7414.83,-2289.5 5021.83,-2289.5 5021.83,-1699.69 7414.83,-1699.69
  lines w8: 5719.78,-2289.5 5719.78,-1699.69 ; 5719.78,-2092.9 7414.83,-2092.9 ; 5719.78,-1896.29 7414.83,-1896.29 ; 6268.18,-2092.9 6268.18,-1896.29 ; 7414.83,-2289.5 5021.83,-2289.5 5021.83,-1699.69 7414.83,-1699.69
  lines w10: -2485,-1390 -2385,-1390 ; -2485,-390 -2385,-390 -2385,610 -2485,610 ; -2485,1610 -2385,1610 ; -2485,2610 -2385,2610 ; -2485,3610 -2385,3610 ; -2485,4610 -2385,4610 ; -1485,-2390 -1485,-2290 ; -1485,5010 -1485,5110 ; -485,-2390 -485,-2290 ; -485,5010 -485,5110 ; 515,-2390 515,-2290 ; 515,5010 515,5110 ; 1515,-2390 1515,-2290 ; 1515,5010 1515,5110 ; 2515,-2390 2515,-2290 ; 2515,5010 2515,5110 ; 3515,-2390 3515,-2290 ; 3515,5010 3515,5110 ; 4515,-2390 4515,-2290 ; 4515,5010 4515,5110 ; 5515,-2390 5515,-2290 ; 5515,5010 5515,5110 ; 6515,-2390 6515,-2290 ; 6515,5010 6515,5110 ; 7414.83,-2289.5 7414.83,-1699.69 ; 7415,-1390 7515,-1390 ; 7415,-390 7515,-390 7515,610 7415,610 ; 7415,1610 7515,1610 ; 7415,2610 7515,2610 ; 7415,3610 7515,3610 ; 7415,4610 7515,4610 ; 7515,-2290 7515,-2390 ; 7515,-2390 -2485,-2390 -2485,5110 7515,5110 7515,-2390 ; -2385,-2290 7415,-2290 7415,5010 -2385,5010 -2385,-2290
  text "1" at -2020,5030 h100
  text "2" at -945,5030 h100
  text "3" at 5,5030 h100
  text "4" at 1055,5030 h100
  text "5" at 2005,5030 h100
  text "6" at 3030,5030 h100
  text "7" at 3980,5030 h100
  text "8" at 4955,5030 h100
  text "9" at 6055,5030 h100
  text "10" at 7005,5030 h100
  text "H" at -2470,4775 h100
  text "H" at 7435,4770 h100
  text "G" at -2470,4050 h100
  text "G" at 7435,4045 h100
  text "F" at -2460,3065 h100
  text "F" at 7445,3060 h100
  text "E" at -2470,2100 h100
  text "E" at 7435,2095 h100
  text "D" at -2470,1100 h100
  text "D" at 7435,1095 h100
  text "C" at -2460,130 h100
  text "C" at 7445,125 h100
  text "B" at -2465,-915 h100
  text "B" at 7440,-920 h100
  text ".PCB_TITLE" at 5769,-1837 h175
  text "" at 5520.37,-1851.77 h152.56
  text "" at 5602.48,-1851.77 h152.56
  text "A" at -2460,-1915 h100
  text "A" at 7445,-1920 h100
  text "R" at 5769.64,-2045.4 h95.35
  text "e" at 5824.38,-2045.4 h95.35
  text "v" at 5879.13,-2045.4 h95.35
  text ":" at 5933.87,-2045.4 h95.35
  text "2" at 5071.68,-2052.46 h343.27
  text ".PCB_VERSION" at 5997,-2053 h175
  text ".ENGINEER" at 6325,-2054 h175
  text "" at 5271.1,-2064.56 h343.27
  text "" at 5421.65,-2064.56 h343.27
  text "W" at 5071.68,-2143.7 h95.35
  text "a" at 5153.8,-2143.7 h95.35
  text "v" at 5208.54,-2143.7 h95.35
  text "e" at 5263.29,-2143.7 h95.35
  text "n" at 5318.03,-2143.7 h95.35
  text "u" at 5372.78,-2143.7 h95.35
  text "m" at 5427.52,-2143.7 h95.35
  text "b" at 5509.64,-2143.7 h95.35
  text "e" at 5564.38,-2143.7 h95.35
  text "r" at 5619.13,-2143.7 h95.35
  text ".GERBER_GEN_DATE" at 5754,-2238 h175
  text "T" at 5071.68,-2242 h95.35
  text "e" at 5126.42,-2242 h95.35
  text "c" at 5181.17,-2242 h95.35
  text "h" at 5222.23,-2242 h95.35
  text "n" at 5276.97,-2242 h95.35
  text "o" at 5331.72,-2242 h95.35
  text "l" at 5386.46,-2242 h95.35
  text "o" at 5413.84,-2242 h95.35
  text "g" at 5468.58,-2242 h95.35
  text "i" at 5523.33,-2242 h95.35
  text "e" at 5550.7,-2242 h95.35
  text "s" at 5605.44,-2242 h95.35
  text "1" at -2010,-2365 h100
  text "2" at -935,-2365 h100
  text "3" at 15,-2365 h100
  text "4" at 1065,-2365 h100
  text "5" at 2015,-2365 h100
  text "6" at 3040,-2365 h100
  text "7" at 3990,-2365 h100
  text "8" at 4965,-2365 h100
  text "9" at 6065,-2365 h100
  text "10" at 7015,-2365 h100
PCB Notes:
  lines w50: -2200,990 2000,990 ; -2150,4190 6800,4190 ; 2050,-160 2050,840
  text "PCB Fabrication Notes" at -2146,4335 h750
  text "Unless otherwise specified, all dimensions are in inches" at -2150,3940 h200
  text "Overall Dimension:   Z.Z\" x  Y.Y\"" at -2150,3740 h200
  text "Finished Thickness:  .062\"" at -2150,3540 h200
  text "Layer Count:" at -2150,3340 h200
  text "Drill Count:" at -2150,3140 h200
  text ".Hole_Count" at -1050,3140 h200
  text "PAD Count:" at -2150,2940 h200
  text ".PAD_Count" at -1050,2940 h200
  text "Solder Mask:  Green LPI SMOBC" at -2150,2740 h200
  text "Silkscreen:  White Non-Conductive Ink LPI Process" at -2150,2540 h200
  text "RS274-X Gerber Format, 2.5 Leading Zeros Suppressed" at -2150,2340 h200
  text "Excellon Drill Format, 2.5 Trailing Zeros Suppressed" at -2150,2140 h200
  text "Layer Details" at -2200,1140 h350
  text "POLARITY" at 700,1090 h350
  text ".GTL" at -2150,640 h200
  text "Top Copper" at -1200,640 h200
  text "POSITIVE" at 800,640 h200
  text ".GBL" at -2150,440 h200
  text "Bottom Copper" at -1200,440 h200
  text "POSITIVE" at 800,440 h200
  text "N-Layer Stackup" at 2200,340 h200
  text ".GTO" at -2150,-910 h200
  text "Top Silkscreen" at -1150,-910 h200
  text ".GBO" at -2150,-1110 h200
  text "Bottom Silkscreen" at -1150,-1110 h200
  text ".GTS" at -2150,-1460 h200
  text "Top Soldermask" at -1150,-1460 h200
  text ".GBS" at -2150,-1660 h200
  text "Bottom Soldermask" at -1150,-1660 h200
  text ".TXT" at -2150,-1860 h200
  text "NC-DRILL" at -1150,-1860 h200
Fabrication Reference  Title Block:
  lines w0: 7414.83,-2289.5 5021.83,-2289.5 5021.83,-1699.69 7414.83,-1699.69
  lines w8: 5719.78,-2289.5 5719.78,-1699.69 ; 5719.78,-2092.9 7414.83,-2092.9 ; 5719.78,-1896.29 7414.83,-1896.29 ; 6268.18,-2092.9 6268.18,-1896.29 ; 7414.83,-2289.5 5021.83,-2289.5 5021.83,-1699.69 7414.83,-1699.69
  lines w10: -2485,-1390 -2385,-1390 ; -2485,-390 -2385,-390 -2385,610 -2485,610 ; -2485,1610 -2385,1610 ; -2485,2610 -2385,2610 ; -2485,3610 -2385,3610 ; -2485,4610 -2385,4610 ; -1485,-2390 -1485,-2290 ; -1485,5010 -1485,5110 ; -485,-2390 -485,-2290 ; -485,5010 -485,5110 ; 515,-2390 515,-2290 ; 515,5010 515,5110 ; 1515,-2390 1515,-2290 ; 1515,5010 1515,5110 ; 2515,-2390 2515,-2290 ; 2515,5010 2515,5110 ; 3515,-2390 3515,-2290 ; 3515,5010 3515,5110 ; 4515,-2390 4515,-2290 ; 4515,5010 4515,5110 ; 5515,-2390 5515,-2290 ; 5515,5010 5515,5110 ; 6515,-2390 6515,-2290 ; 6515,5010 6515,5110 ; 7414.83,-2289.5 7414.83,-1699.69 ; 7415,-1390 7515,-1390 ; 7415,-390 7515,-390 7515,610 7415,610 ; 7415,1610 7515,1610 ; 7415,2610 7515,2610 ; 7415,3610 7515,3610 ; 7415,4610 7515,4610 ; 7515,-2290 7515,-2390 ; 7515,-2390 -2485,-2390 -2485,5110 7515,5110 7515,-2390 ; -2385,-2290 7415,-2290 7415,5010 -2385,5010 -2385,-2290
  text "1" at -2020,5030 h100
  text "2" at -945,5030 h100
  text "3" at 5,5030 h100
  text "4" at 1055,5030 h100
  text "5" at 2005,5030 h100
  text "6" at 3030,5030 h100
  text "7" at 3980,5030 h100
  text "8" at 4955,5030 h100
  text "9" at 6055,5030 h100
  text "10" at 7005,5030 h100
  text "H" at -2470,4775 h100
  text "H" at 7435,4770 h100
  text "Fabrication Reference Drawing" at -800,4590 h500
  text "G" at -2470,4050 h100
  text "G" at 7435,4045 h100
  text "F" at -2460,3065 h100
  text "F" at 7445,3060 h100
  text "E" at -2470,2100 h100
  text "E" at 7435,2095 h100
  text "D" at -2470,1100 h100
  text "D" at 7435,1095 h100
  text "C" at -2460,130 h100
  text "C" at 7445,125 h100
  text "B" at -2465,-915 h100
  text "B" at 7440,-920 h100
  text ".PCB_TITLE" at 5769,-1837 h175
  text "" at 5520.37,-1851.77 h152.56
  text "" at 5602.48,-1851.77 h152.56
  text "A" at -2460,-1915 h100
  text "A" at 7445,-1920 h100
  text "R" at 5769.64,-2045.4 h95.35
  text "e" at 5824.38,-2045.4 h95.35
  text "v" at 5879.13,-2045.4 h95.35
  text ":" at 5933.87,-2045.4 h95.35
  text "2" at 5071.68,-2052.46 h343.27
  text ".PCB_VERSION" at 5997,-2053 h175
  text ".ENGINEER" at 6325,-2054 h175
  text "" at 5271.1,-2064.56 h343.27
  text "" at 5421.65,-2064.56 h343.27
  text "W" at 5071.68,-2143.7 h95.35
  text "a" at 5153.8,-2143.7 h95.35
  text "v" at 5208.54,-2143.7 h95.35
  text "e" at 5263.29,-2143.7 h95.35
  text "n" at 5318.03,-2143.7 h95.35
  text "u" at 5372.78,-2143.7 h95.35
  text "m" at 5427.52,-2143.7 h95.35
  text "b" at 5509.64,-2143.7 h95.35
  text "e" at 5564.38,-2143.7 h95.35
  text "r" at 5619.13,-2143.7 h95.35
  text ".GERBER_GEN_DATE" at 5754,-2238 h175
  text "T" at 5071.68,-2242 h95.35
  text "e" at 5126.42,-2242 h95.35
  text "c" at 5181.17,-2242 h95.35
  text "h" at 5222.23,-2242 h95.35
  text "n" at 5276.97,-2242 h95.35
  text "o" at 5331.72,-2242 h95.35
  text "l" at 5386.46,-2242 h95.35
  text "o" at 5413.84,-2242 h95.35
  text "g" at 5468.58,-2242 h95.35
  text "i" at 5523.33,-2242 h95.35
  text "e" at 5550.7,-2242 h95.35
  text "s" at 5605.44,-2242 h95.35
  text "1" at -2010,-2365 h100
  text "2" at -935,-2365 h100
  text "3" at 15,-2365 h100
  text "4" at 1065,-2365 h100
  text "5" at 2015,-2365 h100
  text "6" at 3040,-2365 h100
  text "7" at 3990,-2365 h100
  text "8" at 4965,-2365 h100
  text "9" at 6065,-2365 h100
  text "10" at 7015,-2365 h100
Board Outline:
  the board outline again, w30